# Altium PCB 10515.0461_全联供输出板_V1.0.PcbDoc (part 2 of 4)
Units mm, origin at the board's own origin, x right, y up, seen from the top; angles counter-clockwise.
Board outline 141.98 x 134.8 mm, 2 copper layers (Top Layer, Bottom Layer); 149 components, 131 nets, 632 pads, 485 vias.
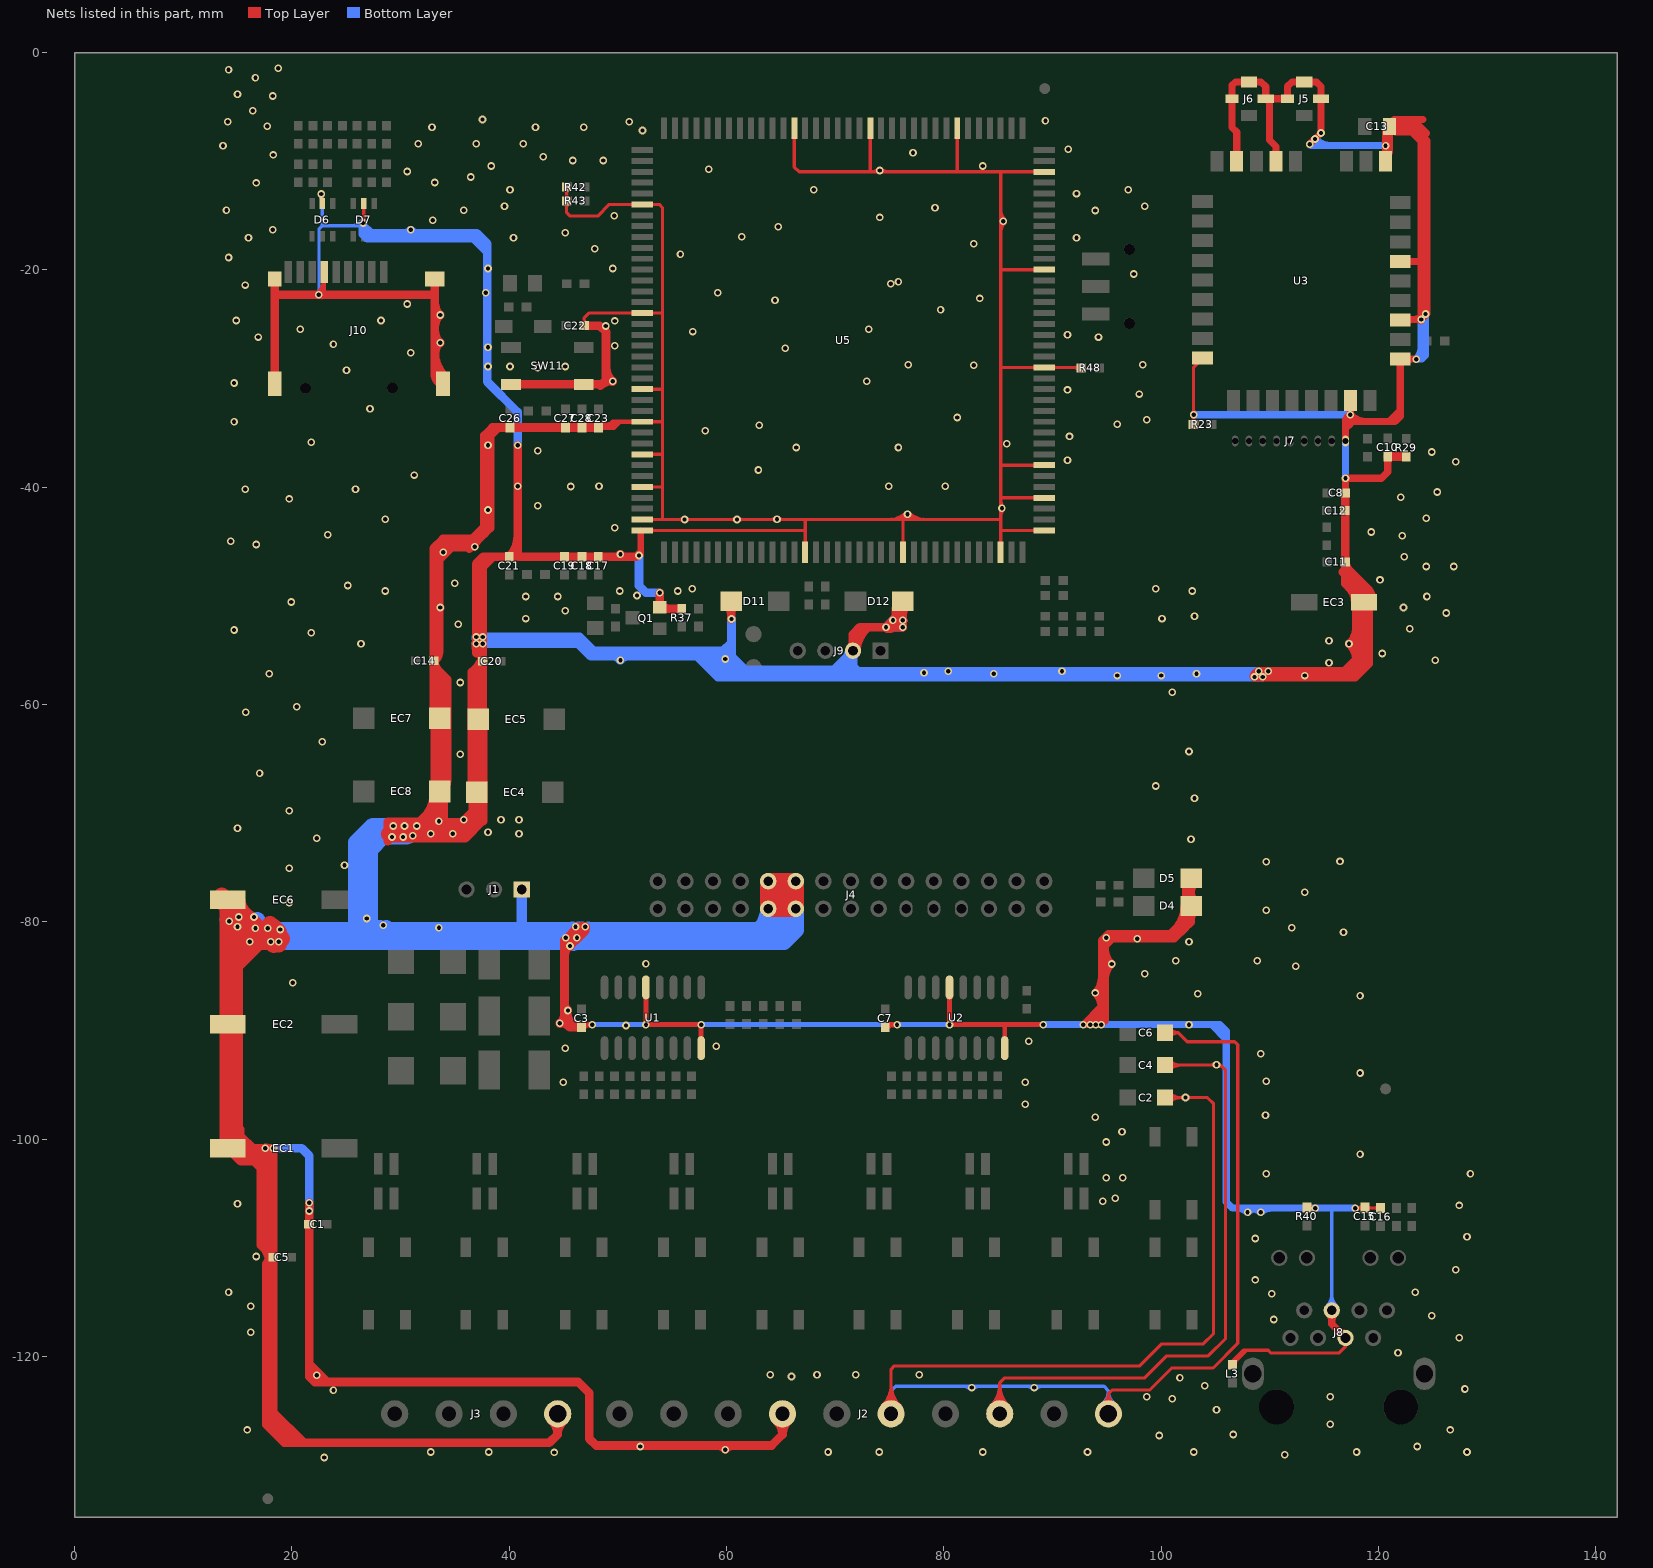
[diagram p2: the nets of this part, all layers, seen from the top]

## Via types
v1: diameter 0.7, hole 0.4, Top Layer to Bottom Layer, tented both sides, 485 vias

## Nets (pads, with @x,y where several pads share a name; then routed paths per layer and width w, separated by ;. In a path a pad name is that pad's centre, name@x,y a point inside that pad or via, vN(x,y) a via of type N, cw(c..) or ccw(c..) an arc to the next point about the centre after c; other vN are vias at no path point) (continued)
GND: C1.1 C2.2 C3.2 C4.2 C5.1 C6.2 C7.2 C8.2 C10.1 C11.2 C12.1 C13.1 C14.1 C15.2 C16.1 C17.1 C18.1 C19.1 C20.1 C21.1 C22.1 C23.1 C26.1 C27.1 C28.1 D4.2 D5.2 D6.2 D7.2 D11.2 D12.2 EC1.2 EC2.2 EC3.2 EC4.2 EC5.2 EC6.2 EC7.2 EC8.2 J1.1 J2.1 J2.3 J2.5 J2.7 J3.1 J4.9 J4.10 J4.11 J4.12 J5.2 J5.3 J5.4 J6.2 J6.3 J6.4 J7.1 J8.4 J8.5 J9.2 J10.6 J10.10 J10.11 J10.12 J10.13 L3.1 Q1.2 R23.1 R29.1 R37.1 R40.2 R42.2 R43.2 R48.1 SW11.3 SW11.4 U1.8 U1.13 U2.8 U2.13 U3.1 U3.5 U3.7 U3.17 U3.24 U3.26 U3.28 U3.31 U5.6 U5.16 U5.23 U5.26 U5.29 U5.32 U5.35 U5.36 U5.50 U5.59 U5.68 U5.71 U5.74 U5.77 U5.86 U5.95 U5.104 U5.113 U5.121 U5.128 | length 2417
  Top Layer w0.3: v1@22.338,-22.137 ccw(c20.832,-20.631) J10.6@22.961,-20.631 ; v1@22.55,-22.349 ccw(c21.557,-21.356) 22.961,-21.356 ; v1@22.553,-13.153 cw(c21.958,-13.748) D6.2@22.799,-13.748 ; 22.762,-22.561 ccw(c22.281,-22.08) 22.961,-22.08 ; D6.2@22.799,-13.896 v1@22.799,-13.068 ; J10.6@22.82,-20.972 cw(c22.478,-21.314) 22.961,-21.314 cw(c23.444,-21.314) J10.6@23.103,-20.972 ; 22.961,-22.278 J10.6@22.961,-20.181 J10.6@22.961,-19.331 ; v1@26.402,-15.533 ccw(c25.901,-15.032) 26.609,-15.032 ; v1@26.609,-15.608 D7.2@26.609,-13.896 ; R43.2@45.094,-13.823 cw(c44.656,-14.261) 45.276,-14.261 cw(c45.895,-14.261) R43.2@45.457,-13.823 ; R43.2@45.094,-13.461 ccw(c44.656,-13.023) 45.276,-13.023 ccw(c45.895,-13.023) R43.2@45.457,-13.461 ; R42.2@45.094,-12.553 cw(c44.656,-12.991) 45.276,-12.991 cw(c45.895,-12.991) R42.2@45.457,-12.553 ; R42.2@45.275,-12.372 45.275,-14.721 45.593,-15.039 48.133,-15.039 49.203,-13.969 U5.6@52.232,-13.969 53.794,-13.969 54.102,-14.277 54.102,-42.969 ; C22.1@46.707,-24.941 ccw(c46.269,-24.503) 46.888,-24.503 ccw(c47.507,-24.503) C22.1@47.07,-24.941 ; C22.1@46.888,-25.122 46.888,-24.412 47.331,-23.969 U5.16@52.232,-23.969 54.015,-23.969 ; U5.16@51.419,-24.057 ccw(c51.205,-24.271) 51.205,-23.969 ccw(c51.205,-23.667) U5.16@51.419,-23.881 ; U5.6@51.419,-14.057 ccw(c51.205,-14.271) 51.205,-13.969 ccw(c51.205,-13.667) U5.6@51.419,-13.881 ; v1@51.943,-46.408 51.943,-45.519 ; 51.943,-45.646 51.943,-45.519 ; 51.943,-44.968 cw(c53.231,-44.968) 52.32,-44.057 ccw(c52.534,-44.271) 52.232,-44.271 ccw(c51.93,-44.271) U5.36@52.144,-44.057 ; 51.943,-44.244 cw(c52.507,-44.244) U5.36@52.108,-43.845 ; U5.36@52.003,-44.189 cw(c52.232,-44.418) U5.36@52.232,-44.094 ; v1@52.014,-46.352 ccw(c51.487,-45.825) 52.232,-45.825 ; U5.36@52.025,-44.167 ccw(c51.827,-43.969) U5.36@52.107,-43.969 ; v1@52.07,-46.408 52.232,-46.246 U5.36@52.232,-43.969 ; v1@52.084,-46.14 cw(c52.426,-45.798) 51.943,-45.798 cw(c51.46,-45.798) 51.802,-46.14 ccw(c50.762,-45.1) 52.232,-45.1 ; U5.35@52.232,-42.969 54.102,-42.969 ; U5.32@52.232,-39.969 54.064,-39.969 ; U5.29@52.232,-36.969 54.061,-36.969 ; U5.26@52.232,-33.969 54.095,-33.969 ; U5.23@52.232,-30.969 54.03,-30.969 ; U5.36@53.045,-44.057 cw(c53.259,-44.271) 53.259,-43.969 cw(c53.259,-43.667) U5.36@53.045,-43.881 ; U5.35@53.045,-43.057 cw(c53.259,-43.271) 53.259,-42.969 cw(c53.259,-42.667) U5.35@53.045,-42.881 ; U5.32@53.045,-40.057 cw(c53.259,-40.271) 53.259,-39.969 cw(c53.259,-39.667) U5.32@53.045,-39.881 ; U5.29@53.045,-37.057 cw(c53.259,-37.271) 53.259,-36.969 cw(c53.259,-36.667) U5.29@53.045,-36.881 ; U5.26@53.045,-34.057 cw(c53.259,-34.271) 53.259,-33.969 ; U5.26@53.045,-33.881 ccw(c53.259,-33.667) 53.259,-33.969 ; U5.23@53.045,-31.057 cw(c53.259,-31.271) 53.259,-30.969 cw(c53.259,-30.667) U5.23@53.045,-30.881 ; U5.16@53.045,-24.057 cw(c53.259,-24.271) 53.259,-23.969 cw(c53.259,-23.667) U5.16@53.045,-23.881 ; U5.6@53.045,-14.057 cw(c53.259,-14.271) 53.259,-13.969 cw(c53.259,-13.667) U5.6@53.045,-13.881 ; v1@55.993,-43.11 ccw(c55.651,-43.452) 55.651,-42.969 ccw(c55.651,-42.486) v1@55.993,-42.828 ; v1@56.275,-43.11 cw(c56.617,-43.452) 56.617,-42.969 cw(c56.617,-42.486) v1@56.275,-42.828 ; D11.2@60.427,-50.472 D11.2@60.427,-50.218 ; v1@60.819,-43.11 ccw(c60.477,-43.452) 60.477,-42.969 ccw(c60.477,-42.486) v1@60.819,-42.828 ; v1@61.101,-43.11 cw(c61.443,-43.452) 61.443,-42.969 cw(c61.443,-42.486) v1@61.101,-42.828 ; J4.10@63.833,-76.253 J4.12@66.373,-76.253 ; 64.092,-42.969 ccw(c64.092,-42.39) v1@64.502,-42.799 ; 64.228,-42.969 cw(c64.228,-43.356) v1@64.502,-43.082 ; J4.10@64.266,-76.686 cw(c65.31,-77.73) 65.31,-76.253 cw(c65.31,-74.775) J4.10@64.266,-75.82 ; v1@64.784,-43.082 cw(c65.058,-43.356) 65.058,-42.969 ; v1@64.784,-42.799 ccw(c65.194,-42.39) 65.194,-42.969 ; J4.12@65.94,-76.686 ccw(c64.895,-77.73) 64.895,-76.253 ccw(c64.895,-74.775) J4.12@65.94,-75.82 ; U5.128@66.144,-7.782 cw(c65.93,-7.996) 66.232,-7.996 cw(c66.534,-7.996) U5.128@66.32,-7.782 ; U5.128@66.232,-6.969 66.232,-10.532 66.669,-10.969 85.232,-10.969 ; U5.50@67.144,-45.156 ccw(c66.93,-44.942) 67.232,-44.942 ccw(c67.534,-44.942) U5.50@67.32,-45.156 ; 67.157,-43.969 U5.36@52.232,-43.969 ; U5.50@67.232,-45.969 67.232,-43.018 ; U5.121@73.144,-7.782 cw(c72.93,-7.996) 73.232,-7.996 cw(c73.534,-7.996) U5.121@73.32,-7.782 ; 73.232,-10.889 U5.121@73.232,-6.969 ; 73.333,-10.969 ccw(c73.333,-10.073) v1@73.967,-10.707 ; v1@74.25,-10.707 ccw(c74.883,-10.073) 74.883,-10.969 ; J2.5@74.366,-124.497 ccw(c72.488,-122.619) 75.144,-122.619 ccw(c77.8,-122.619) J2.5@75.922,-124.497 ; J2.5@74.578,-124.709 ccw(c73.213,-123.344) 75.144,-123.344 ccw(c77.075,-123.344) J2.5@75.71,-124.709 ; 74.963,-42.969 ccw(c74.963,-40.786) v1@76.507,-42.33 ; J2.5@75.144,-125.275 75.144,-121.164 75.438,-120.87 98.025,-120.87 100.051,-118.844 103.861,-118.844 104.821,-117.884 104.821,-96.725 104.263,-96.167 C2.2@100.356,-96.167 ; 75.687,-42.969 ccw(c75.687,-41.51) v1@76.719,-42.542 ; U5.59@76.144,-45.156 ccw(c75.93,-44.942) 76.232,-44.942 ccw(c76.534,-44.942) U5.59@76.32,-45.156 ; U5.59@76.232,-45.969 76.232,-43.064 ; 76.365,-42.754 ccw(c76.885,-42.234) 76.885,-42.969 ; 76.412,-42.969 ccw(c76.412,-42.234) 76.931,-42.754 ; v1@76.577,-42.542 ccw(c77.609,-41.51) 77.609,-42.969 ; v1@76.79,-42.33 ccw(c78.333,-40.786) 78.333,-42.969 ; U5.113@81.144,-7.782 cw(c80.93,-7.996) 81.232,-7.996 cw(c81.534,-7.996) U5.113@81.32,-7.782 ; 81.232,-10.921 U5.113@81.232,-6.969 ; J2.3@84.366,-124.497 ccw(c82.488,-122.619) 85.144,-122.619 ccw(c87.8,-122.619) J2.3@85.922,-124.497 ; J2.3@84.578,-124.709 ccw(c83.213,-123.344) 85.144,-123.344 ccw(c87.075,-123.344) J2.3@85.71,-124.709 ; 85.095,-42.969 54.102,-42.969 ; U5.68@85.144,-45.156 ccw(c84.93,-44.942) 85.232,-44.942 ccw(c85.534,-44.942) U5.68@85.32,-45.156 ; J2.3@85.144,-125.275 85.144,-122.432 85.598,-121.978 98.484,-121.978 100.51,-119.952 104.32,-119.952 105.929,-118.343 105.929,-93.652 105.459,-93.182 ; U5.68@85.232,-45.969 85.232,-10.969 ; 85.232,-42.678 cw(c86.097,-42.678) v1@85.485,-42.066 ; 85.232,-41.172 ccw(c86.097,-41.172) v1@85.485,-41.783 ; 85.232,-16.569 cw(c86.531,-16.569) v1@85.612,-15.65 ; 85.232,-15.844 cw(c85.807,-15.844) v1@85.4,-15.438 ; 85.232,-15.173 ccw(c85.807,-15.173) v1@85.4,-15.58 ; 85.232,-14.449 ccw(c86.531,-14.449) v1@85.612,-15.367 ; 85.272,-28.969 U5.86@89.232,-28.969 R48.1@92.607,-28.969 ; 85.289,-37.969 U5.77@89.232,-37.969 ; 85.333,-43.969 U5.71@89.232,-43.969 ; 85.337,-40.969 U5.74@89.232,-40.969 ; 85.382,-19.969 U5.95@89.232,-19.969 ; U5.71@88.419,-44.057 ccw(c88.205,-44.271) 88.205,-43.969 ccw(c88.205,-43.667) U5.71@88.419,-43.881 ; U5.74@88.419,-41.057 ccw(c88.205,-41.271) 88.205,-40.969 ccw(c88.205,-40.667) U5.74@88.419,-40.881 ; U5.77@88.419,-38.057 ccw(c88.205,-38.271) 88.205,-37.969 ccw(c88.205,-37.667) U5.77@88.419,-37.881 ; U5.86@88.419,-29.057 ccw(c88.205,-29.271) 88.205,-28.969 ccw(c88.205,-28.667) U5.86@88.419,-28.881 ; U5.95@88.419,-20.057 ccw(c88.205,-20.271) 88.205,-19.969 ccw(c88.205,-19.667) U5.95@88.419,-19.881 ; U5.104@88.419,-11.057 ccw(c88.205,-11.271) 88.205,-10.969 ccw(c88.205,-10.667) U5.104@88.419,-10.881 ; U5.104@89.232,-10.969 85.232,-10.969 ; U5.86@90.045,-29.057 cw(c90.259,-29.271) 90.259,-28.969 cw(c90.259,-28.667) U5.86@90.045,-28.881 ; 91.893,-28.969 cw(c91.893,-29.725) R48.1@92.427,-29.19 ; 92.086,-28.969 ccw(c92.086,-28.487) R48.1@92.427,-28.828 ; J2.1@94.628,-124.303 ccw(c94.174,-123.446) 95.144,-123.446 ; J2.1@94.769,-124.568 ccw(c94.438,-123.945) 95.144,-123.945 ccw(c95.85,-123.945) J2.1@95.519,-124.568 ; J2.1@95.144,-125.275 95.144,-123.446 ; J2.1@95.66,-124.303 cw(c96.114,-123.446) 95.144,-123.446 ; C4.2@100.356,-93.182 105.459,-93.182 ; C6.2@100.356,-90.198 101.575,-90.198 ; C2.2@100.78,-96.591 cw(c101.804,-97.615) 101.804,-96.167 cw(c101.804,-94.718) C2.2@100.78,-95.742 ; C4.2@100.78,-93.606 cw(c101.804,-94.631) 101.804,-93.182 cw(c101.804,-91.734) C4.2@100.78,-92.758 ; C6.2@100.831,-90.563 cw(c101.575,-91.135) 101.575,-90.198 ; C6.2@100.831,-89.832 ccw(c101.575,-89.26) 101.575,-90.198 ; v1@102.094,-96.308 ccw(c101.752,-96.649) 101.752,-96.167 ccw(c101.752,-95.684) v1@102.094,-96.025 ; v1@102.376,-96.308 cw(c102.718,-96.649) 102.718,-96.167 cw(c102.718,-95.684) v1@102.376,-96.025 ; R23.1@102.796,-34.035 ccw(c102.358,-33.597) 102.978,-33.597 ccw(c103.597,-33.597) R23.1@103.159,-34.035 ; v1@102.856,-33.468 cw(c102.561,-33.763) 102.978,-33.763 ; v1@102.856,-33.186 ccw(c102.561,-32.891) 102.978,-32.891 ; R23.1@102.978,-34.216 102.978,-28.934 U3.17@103.803,-28.108 ; R23.1@102.978,-33.857 cw(c103.527,-33.857) v1@103.138,-33.468 ; 102.978,-32.797 ccw(c103.527,-32.797) v1@103.138,-33.186 ; 104.521,-93.182 ccw(c104.521,-92.569) v1@104.955,-93.003 ; 104.705,-93.182 cw(c104.705,-93.535) v1@104.955,-93.285 ; v1@105.211,-93.308 cw(c105.394,-93.572) 105.621,-93.344 ; v1@105.245,-93.278 cw(c105.459,-93.47) 105.459,-93.182 ; v1@105.28,-93.064 ccw(c105.459,-92.986) 105.459,-93.182 ; L3.1@106.509,-120.728 cw(c107.079,-120.728) L3.1@106.676,-120.326 ; L3.1@106.553,-120.472 ccw(c106.553,-119.761) 107.056,-120.264 ; 106.964,-120.356 ccw(c107.336,-120.728) 106.809,-120.728 cw(c108.103,-120.728) 107.188,-119.814 ; 107.823,-119.496 L3.1@106.553,-120.766 106.553,-120.449 107.569,-119.433 109.855,-119.433 110.109,-119.687 116.332,-119.687 116.971,-119.048 J8.4@116.971,-118.294 ; R40.2@113.411,-106.288 v1@114.236,-106.288 ; R40.2@113.537,-106.288 cw(c113.537,-106.988) v1@114.032,-106.493 ; R40.2@113.592,-106.47 cw(c114.03,-106.908) 114.03,-106.288 cw(c114.03,-105.669) R40.2@113.592,-106.107 ; v1@117.917,-106.291 C15.2@118.753,-106.291 ; v1@117.997,-106.493 cw(c118.487,-106.983) C15.2@118.487,-106.291 ; C15.2@118.571,-106.472 ccw(c118.134,-106.91) 118.134,-106.291 ccw(c118.134,-105.672) C15.2@118.571,-106.109 ; C15.2@118.798,-106.336 C16.1@120.192,-106.336 ; C15.2@118.934,-106.51 cw(c119.354,-106.931) 119.354,-106.336 ; C15.2@118.934,-106.148 ccw(c119.389,-105.693) 119.389,-106.336 ; C16.1@120.011,-106.517 ccw(c119.573,-106.955) 119.573,-106.336 ccw(c119.573,-105.717) C16.1@120.011,-106.155 ; U3.28@122.003,-24.608 U3.28@122.047,-24.608 ; v1@123.93,-24.586 v1(123.93,-24.564) ; 51.943,-45.519 51.943,-44.249 52.223,-43.969 U5.36@52.232,-43.969 ; 95.144,-123.446 95.504,-123.086 98.943,-123.086 100.969,-121.06 104.779,-121.06 107.037,-118.802 107.037,-91.309 106.759,-91.031 102.408,-91.031 101.575,-90.198
  Top Layer w0.45: C3.2@46.659,-89.69 46.888,-89.461 v1(47.625,-89.461) ; C3.2@46.787,-89.78 cw(c47.557,-90.549) v1@47.557,-89.461 ; C23.1@48.21,-34.495 49.632,-34.495 50.158,-33.969 ; C23.1@48.338,-34.624 cw(c48.648,-34.933) 48.648,-34.495 cw(c48.648,-34.057) C23.1@48.338,-34.367 ; C23.1@48.338,-34.586 cw(c49.2,-35.447) 49.2,-34.229 ; C23.1@48.477,-34.229 49.289,-34.229 ; 49.022,-34.495 49.289,-34.229 ; U5.26@52.232,-33.969 50.158,-33.969 ; U1.13@52.578,-86.032 v1(52.578,-89.461) v1(57.658,-89.461) U1.8@57.658,-91.62 ; C7.2@74.727,-89.78 cw(c75.497,-90.549) v1@75.497,-89.461 ; C7.2@74.828,-89.461 v1(75.692,-89.461) ; U2.13@80.518,-86.032 v1(80.518,-89.461) 85.598,-89.461 ; U2.8@85.598,-91.62 85.598,-89.461 ; v1(89.154,-89.461) 85.598,-89.461 ; 49.289,-34.229 49.548,-33.969 50.158,-33.969
  Top Layer w0.65: v1@92.837,-89.436 ccw(c92.837,-88.149) 93.747,-89.059 ; v1@93.472,-89.436 ccw(c93.472,-88.149) 94.382,-89.059 ; v1@93.497,-89.461 cw(c95.09,-89.461) 93.964,-88.334 ; v1@93.902,-86.558 cw(c92.489,-87.971) 94.488,-87.971 ; v1@93.902,-86.522 ccw(c92.489,-85.109) 94.488,-85.109 ; v1@93.981,-89.436 ccw(c94.009,-88.22) 94.869,-89.08 ; v1@94.005,-89.461 cw(c95.598,-89.461) 94.472,-88.334 ; v1@94.47,-89.443 ccw(c93.508,-88.481) 94.869,-88.481 ; 94.488,-88.318 93.345,-89.461 v1(92.837,-89.461) ; 94.488,-87.81 v1(92.837,-89.461) ; 94.488,-82.602 cw(c96.079,-82.602) 94.954,-81.478 cw(c95.916,-82.44) 95.916,-81.079 ; 94.488,-81.975 cw(c94.98,-81.975) v1@94.938,-81.485 ; 94.562,-81.64 cw(c94.936,-82.014) v1@94.936,-81.485 ; 94.869,-85.322 cw(c96.893,-85.322) v1@95.462,-83.891 ; 94.869,-82.424 ccw(c96.893,-82.424) v1@95.462,-83.855 ; v1@94.961,-81.46 cw(c95.49,-81.46) 95.116,-81.086 ; 96.595,-81.079 cw(c96.595,-82.744) v1@97.772,-81.567 ; v1@97.808,-81.567 cw(c98.985,-82.744) 98.985,-81.079 ; 101.193,-80.724 ccw(c99.02,-78.551) D4.2@102.093,-78.541 ; 102.108,-80.698 102.768,-80.038 D4.2@102.768,-78.539 D5.2@102.768,-75.999 ; 102.235,-80.246 cw(c103.609,-80.246) D4.2@102.946,-79.043 ; 102.235,-80.19 102.235,-76.532 ccw(c104.162,-76.532) D4.2@103.011,-78.078 ; 102.235,-79.682 100.838,-81.079 100.711,-81.079 ; D4.2@102.235,-78.433 cw(c105.102,-78.433) D5.2@103.075,-76.406 ; D5.2@102.235,-76.863 cw(c103.532,-76.863) D5.2@102.615,-75.946 ; 102.297,-79.62 ccw(c101.222,-78.544) D4.2@102.743,-78.539 ; D4.2@102.361,-78.946 cw(c101.38,-79.927) 102.768,-79.927 cw(c104.156,-79.927) D4.2@103.175,-78.946 ; D4.2@102.361,-78.132 ccw(c101.38,-77.151) 102.768,-77.151 ccw(c104.156,-77.151) D4.2@103.175,-78.132 ; D5.2@102.361,-76.406 cw(c101.38,-77.387) 102.768,-77.387 cw(c104.156,-77.387) D5.2@103.175,-76.406 ; U3.7@106.759,-9.464 ccw(c106.289,-8.994) 106.953,-8.994 ccw(c107.617,-8.994) U3.7@107.147,-9.464 ; U3.7@106.953,-10.008 106.953,-7.311 106.527,-6.885 J6.4@106.527,-4.244 106.527,-3 106.833,-2.694 J6.2@108.077,-2.694 109.194,-2.694 109.627,-3.127 J6.3@109.627,-4.244 ; U3.5@110.359,-9.464 ccw(c109.889,-8.994) 110.553,-8.994 ccw(c111.217,-8.994) U3.5@110.747,-9.464 ; U3.5@110.553,-10.008 110.553,-8.625 109.982,-8.054 109.982,-4.599 J6.3@109.627,-4.244 ; v1(113.665,-8.435) v1(114.707,-7.393) J5.3@114.707,-4.244 114.707,-3.127 114.274,-2.694 J5.2@113.157,-2.694 112.04,-2.694 111.607,-3.127 J5.4@111.607,-4.244 J6.3@109.627,-4.244 ; J8.5@115.4,-116.054 cw(c114.675,-116.78) 115.701,-116.78 cw(c116.727,-116.78) J8.5@116.001,-116.054 ; J8.5@115.701,-115.754 115.701,-117.024 J8.4@116.971,-118.294 ; J8.4@116.546,-118.294 ccw(c115.52,-118.294) 116.245,-117.568 ccw(c116.971,-116.843) J8.4@116.971,-117.869 ; C8.2@116.967,-40.491 v1(116.967,-39.169) 120.269,-39.169 120.854,-38.584 C10.1@120.854,-37.162 ; J7.1@116.967,-35.74 116.967,-34.597 ; 116.967,-34.457 cw(c118.54,-34.457) v1@117.428,-33.345 ; 116.967,-33.954 cw(c117.596,-33.954) v1@117.417,-33.351 ; U3.24@117.216,-32.552 cw(c116.746,-33.022) 117.41,-33.022 cw(c118.074,-33.022) U3.24@117.605,-32.552 ; v1(117.41,-33.327) 116.967,-33.77 116.967,-34.597 ; U3.24@117.41,-32.008 117.41,-33.962 ; v1@117.428,-33.309 ccw(c119.004,-31.734) 119.004,-33.962 ; v1@120.635,-8.544 ccw(c119.68,-7.589) 121.031,-7.589 ; v1@120.642,-8.585 cw(c120.357,-9.195) U3.1@121.031,-9.195 ; v1@120.653,-8.508 cw(c122.573,-8.508) 121.215,-7.15 ccw(c121.661,-7.596) 121.031,-7.596 ; C13.1@120.827,-7.15 cw(c120.333,-7.644) 121.031,-7.644 ; U3.1@120.847,-9.464 cw(c121.317,-8.994) 120.653,-8.994 cw(c119.989,-8.994) 120.459,-9.464 ccw(c119.077,-8.082) 121.031,-8.082 ; 120.987,-33.962 122.003,-32.946 ; C13.1@121.031,-6.804 121.031,-9.07 120.653,-9.448 U3.1@120.653,-10.008 v1(120.653,-8.562) 120.653,-7.162 C13.1@121.021,-6.794 ; C13.1@121.215,-6.988 cw(c121.685,-7.458) 121.685,-6.794 cw(c121.685,-6.13) C13.1@121.215,-6.6 ; C13.1@121.215,-6.826 cw(c122.851,-8.462) 122.851,-6.149 ; C13.1@121.215,-6.762 ccw(c122.496,-5.481) 122.496,-7.292 ; U3.26@121.809,-28.402 cw(c121.339,-28.872) 122.003,-28.872 cw(c122.667,-28.872) U3.26@122.197,-28.402 ; U3.31@122.003,-19.208 123.93,-19.208 ; U3.28@122.047,-24.564 v1(123.93,-24.564) 123.93,-19.208 ; U3.26@122.547,-28.402 cw(c123.017,-28.872) 123.017,-28.208 cw(c123.017,-27.544) U3.26@122.547,-28.014 ; U3.28@122.547,-24.802 cw(c123.123,-25.378) 123.123,-24.564 ; U3.31@122.547,-19.402 cw(c123.017,-19.872) 123.017,-19.208 cw(c123.017,-18.544) U3.31@122.547,-19.014 ; 123.046,-24.564 ccw(c123.046,-22.769) 124.315,-24.038 ccw(c123.966,-23.689) 124.46,-23.689 ; v1(123.483,-28.208) U3.26@122.003,-28.208 122.003,-32.946 ; v1@123.93,-24.704 cw(c124.61,-24.704) v1@124.343,-24.079 ; v1@123.93,-24.586 124.46,-24.056 124.46,-8.076 123.93,-7.546 ; 123.93,-23.023 ccw(c125.366,-23.023) v1@124.351,-24.038 ; 123.93,-8.181 123.041,-7.292 121.519,-7.292 C13.1@121.021,-6.794 ; 124.079,-6.149 123.571,-6.149 ; 124.4,-7.419 123.571,-6.59 123.571,-6.149 ; v1(92.837,-89.461) v1(93.98,-89.461) ; v1(93.98,-89.461) v1(94.488,-89.461) 94.869,-89.08 ; v1(93.98,-89.461) 94.488,-88.953 94.488,-81.714 95.123,-81.079 100.711,-81.079 ; 94.869,-89.08 94.869,-82.222 95.504,-81.587 101.219,-81.587 102.26,-80.546 101.727,-81.079 100.711,-81.079 ; 116.967,-34.597 117.41,-34.154 117.41,-33.962 ; 117.41,-33.962 121.539,-33.962 122.003,-33.498 122.003,-32.946 ; C13.1@121.021,-6.794 121.021,-6.54 121.412,-6.149 123.571,-6.149 ; C13.1@121.021,-6.794 123.178,-6.794 123.93,-7.546 ; 123.93,-19.208 123.93,-7.546 ; v1@94.954,-81.442 ccw(c95.303,-81.093) 95.303,-81.587 cw(c95.303,-81.093) v1@94.954,-81.442
  Top Layer w0.8: EC1.2@13.766,-100.526 ccw(c12.998,-99.758) 14.084,-99.758 ccw(c15.17,-99.758) EC1.2@14.402,-100.526 ; EC2.2@13.766,-89.732 cw(c12.998,-90.5) 14.084,-90.5 cw(c15.17,-90.5) EC2.2@14.402,-89.732 ; EC2.2@13.766,-89.096 ccw(c12.998,-88.328) 14.084,-88.328 ccw(c15.17,-88.328) EC2.2@14.402,-89.096 ; EC6.2@13.766,-78.302 cw(c12.998,-79.07) 14.084,-79.07 cw(c15.17,-79.07) EC6.2@14.402,-78.302 ; v1@14.174,-79.936 ccw(c15.28,-79.936) 14.498,-80.718 ; EC2.2@14.566,-89.732 cw(c13.245,-91.053) 15.113,-91.053 ; EC2.2@14.566,-89.096 ccw(c13.245,-87.775) 15.113,-87.775 ; EC1.2@14.594,-100.5 ccw(c13.428,-99.113) 15.24,-99.113 15.24,-100.002 14.398,-100.844 EC1.2@14.084,-100.844 ; EC1.2@14.731,-100.529 cw(c15.345,-101.793) 16.338,-100.799 ; EC6.2@14.884,-78.434 cw(c14.884,-79.347) EC6.2@15.529,-78.701 ; EC1.2@14.98,-101.284 cw(c15.195,-102.261) 15.902,-101.553 ; 15.113,-99.113 15.113,-84 ; 15.113,-82.349 15.113,-81.333 ; EC1.2@15.202,-101.162 cw(c15.97,-101.93) 15.97,-100.844 cw(c15.97,-99.758) EC1.2@15.202,-100.526 ; 15.24,-99.701 16.383,-100.844 ; 15.24,-84 17.399,-81.841 ; EC1.2@15.244,-100.574 ccw(c16.891,-99.343) 16.891,-101.399 ; EC6.2@15.334,-77.984 ccw(c16.594,-77.984) 15.703,-78.875 ; 15.347,-82.115 cw(c16.129,-82.897) v1@16.129,-81.791 ; 15.367,-82.095 cw(c16.102,-82.83) v1@16.13,-81.791 ; 15.367,-81.587 ccw(c16.102,-80.852) v1@16.13,-81.891 ; 16.184,-79.356 cw(c14.968,-80.571) v1@16.687,-80.571 ; v1@16.637,-80.521 cw(c16.637,-82.24) 17.852,-81.024 ; 17.035,-82.205 cw(c18.034,-83.203) v1@18.034,-81.791 ; 17.082,-82.158 cw(c17.972,-83.049) v1@18.037,-81.791 ; 17.215,-80.387 ccw(c17.78,-79.822) v1@17.78,-80.621 ; v1@17.476,-100.844 ccw(c18.45,-100.844) 17.761,-101.533 ; v1@17.53,-100.794 cw(c17.474,-101.581) 18.263,-101.581 ; v1@17.561,-100.809 cw(c15.868,-102.502) 18.263,-102.502 ; v1@17.575,-100.855 cw(c16.891,-100.697) 16.891,-101.399 ; 17.653,-125.148 17.653,-124.513 ; 17.653,-112.269 cw(c19.62,-112.269) C5.1@18.229,-110.879 ; 17.653,-111.71 cw(c18.54,-111.71) C5.1@18.227,-110.88 ; 17.653,-109.479 ccw(c19.62,-109.479) C5.1@18.229,-110.869 ; v1@17.653,-80.825 14.812,-77.984 EC6.2@14.084,-77.984 14.084,-80.304 15.113,-81.333 ; C5.1@18.225,-110.868 cw(c18.257,-110.264) 17.653,-110.264 ; 18.263,-102.034 17.628,-101.399 16.891,-101.399 ; J10.11@18.415,-30.471 18.415,-22.278 ; J10.10@18.415,-20.819 18.415,-22.278 ; v1(18.796,-81.841) 15.621,-81.841 ; 20.066,-127.942 17.653,-125.529 17.653,-126.291 ; 21.209,-127.942 43.688,-127.942 44.457,-127.173 ; v1(21.59,-105.844) 21.59,-120.703 ; 22.156,-121.269 cw(c21.705,-121.719) v1@22.342,-121.719 ; v1@22.248,-121.741 ccw(c23.241,-121.242) 23.241,-122.354 ; v1@22.271,-121.764 cw(c22.757,-120.703) 21.59,-120.703 ; v1@22.292,-121.669 cw(c22.292,-122.306) 22.743,-121.856 ; 28.829,-72.591 cw(c29.288,-72.591) v1@29.2,-72.14 ; 28.829,-72.279 cw(c30.443,-72.279) 29.302,-71.138 cw(c30.136,-71.972) 30.136,-70.792 ; 28.829,-71.39 ccw(c30.009,-71.39) v1@29.175,-72.224 ; v1(29.337,-71.173) v1@29.337,-72.316 ; v1@29.383,-71.153 ccw(c28.829,-71.397) 28.829,-70.792 ; 29.554,-70.792 cw(c29.554,-71.972) v1@30.388,-71.138 ; v1@30.318,-71.138 cw(c31.152,-71.972) 31.152,-70.792 ; 30.622,-72.316 ccw(c30.622,-71.569) v1@31.15,-72.097 ; 30.697,-70.792 cw(c30.697,-71.972) v1@31.531,-71.138 ; v1@31.08,-72.097 ccw(c31.608,-71.569) 31.608,-72.316 ; 32.223,-70.319 ccw(c30.292,-68.389) EC8.2@33.003,-68.069 ; J10.13@32.936,-21.03 cw(c32.426,-21.54) 33.147,-21.54 cw(c33.868,-21.54) J10.13@33.358,-21.03 ; EC7.2@33.045,-60.413 ccw(c34.453,-60.413) EC7.2@33.458,-61.408 ; 33.045,-58.482 ccw(c36.384,-58.482) 34.023,-60.843 cw(c35.048,-59.818) 33.599,-59.818 cw(c32.15,-59.818) 33.175,-60.843 ccw(c30.482,-58.15) 34.29,-58.15 ; 33.045,-56.441 34.29,-57.686 34.29,-66.982 ; 33.045,-52.42 cw(c35.006,-52.42) v1@33.62,-51.034 ; 33.045,-49.718 ccw(c35.006,-49.718) v1@33.62,-51.104 ; C14.1@33.079,-55.955 ccw(c31.995,-54.871) 33.528,-54.871 ; C14.1@33.08,-55.954 ccw(c32.619,-55.171) 33.528,-55.171 ; EC8.2@33.147,-67.546 33.147,-61.267 EC7.2@33.599,-61.267 ; 33.147,-65.458 ccw(c36.139,-65.458) 34.023,-67.574 cw(c35.048,-66.549) 33.599,-66.549 cw(c32.15,-66.549) 33.175,-67.574 ccw(c30.482,-64.881) 34.29,-64.881 ; 33.147,-63.807 cw(c36.139,-63.807) 34.023,-61.691 ccw(c35.048,-62.716) 33.599,-62.716 ccw(c32.15,-62.716) 33.175,-61.691 cw(c30.482,-64.384) 34.29,-64.384 ; 33.147,-29.488 ccw(c34.385,-29.488) J10.12@33.509,-30.363 ; 33.147,-27.791 cw(c34.761,-27.791) v1@33.62,-26.65 ; 33.147,-27.556 ccw(c36.316,-27.556) J10.12@34.075,-29.797 ; 33.147,-25.579 ccw(c34.761,-25.579) v1@33.62,-26.72 ; 33.147,-25.251 cw(c34.761,-25.251) v1@33.62,-24.11 ; 33.147,-23.039 ccw(c34.761,-23.039) v1@33.62,-24.18 ; J10.13@33.147,-20.819 33.147,-22.278 ; 33.338,-55.361 ccw(c33.937,-55.96) 33.09,-55.96 ccw(c34.359,-55.96) 33.462,-56.857 ; 33.389,-69.153 ccw(c32.378,-68.142) EC8.2@33.798,-67.974 ; 33.409,-46.146 cw(c33.909,-46.646) v1@33.909,-45.939 ; EC8.2@33.599,-68.943 31.75,-70.792 28.829,-70.792 ; 33.599,-56.995 EC7.2@33.599,-61.267 ; EC8.2@33.74,-68.139 ccw(c32.414,-66.813) 34.29,-66.813 ; EC7.2@33.74,-61.408 ccw(c32.414,-60.082) 34.29,-60.082 ; EC7.2@33.74,-61.126 cw(c32.414,-62.452) 34.29,-62.452 ; 33.788,-46.402 ccw(c33.375,-45.989) v1@33.959,-45.989 ; v1@33.859,-45.992 cw(c34.467,-45.95) 34.036,-45.519 ; v1@33.874,-45.954 cw(c34.923,-47.003) 34.923,-45.519 ; v1@33.909,-46.039 ccw(c33.909,-45.454) 34.322,-45.868 ; J10.12@33.909,-30.471 33.147,-29.709 33.147,-22.278 ; EC8.2@34.147,-67.754 cw(c34.78,-67.472) 34.29,-66.982 ; 34.671,-45.519 33.528,-46.662 33.528,-55.171 ; 36.33,-45.638 cw(c36.83,-46.138) v1@36.83,-45.431 ; EC4.2@36.576,-67.638 36.576,-57.001 C20.1@37.567,-56.01 ; 36.576,-65.571 ccw(c39.517,-65.571) 37.437,-67.651 cw(c38.462,-66.626) 37.013,-66.626 cw(c35.564,-66.626) 36.589,-67.651 ccw(c34.167,-65.229) 37.592,-65.229 ; 36.576,-64.154 cw(c39.95,-64.154) 37.564,-61.768 ccw(c38.895,-63.099) 37.013,-63.099 ; EC5.2@36.576,-62.223 cw(c38.019,-62.223) EC5.2@36.999,-61.203 ; EC5.2@36.576,-60.465 ccw(c38.019,-60.465) EC5.2@36.999,-61.485 ; 36.576,-58.534 ccw(c39.95,-58.534) 37.564,-60.92 cw(c38.589,-59.895) 37.14,-59.895 cw(c35.691,-59.895) 36.716,-60.92 ccw(c34.662,-58.866) 37.567,-58.866 ; EC4.2@36.611,-68.52 cw(c34.616,-70.729) 37.592,-70.729 ; v1@36.78,-45.481 cw(c37.487,-45.481) 36.987,-44.981 ; v1@36.907,-54.405 ccw(c38.084,-54.501) 37.249,-55.336 ; 36.957,-55.289 cw(c37.979,-55.289) v1@37.545,-54.364 ; 36.957,-55.125 cw(c38.918,-55.125) v1@37.531,-53.739 ; 36.957,-53.058 ccw(c38.918,-53.058) v1@37.531,-54.444 ; 36.957,-52.423 ccw(c38.918,-52.423) v1@37.531,-53.809 ; v1@36.992,-54.444 ccw(c35.606,-53.058) 37.567,-53.058 ; v1@36.992,-54.374 cw(c35.606,-55.76) C20.1@37.567,-55.76 ; v1@36.992,-53.809 ccw(c35.606,-52.423) 37.567,-52.423 ; v1@36.992,-53.739 cw(c35.606,-55.125) 37.567,-55.125 ; 37.013,-62.486 ccw(c35.998,-62.486) 36.716,-61.768 cw(c34.6,-63.884) 37.592,-63.884 ; 37.14,-56.963 cw(c38.482,-56.963) C20.1@37.533,-56.015 ; 37.14,-56.587 cw(c37.753,-56.587) C20.1@37.531,-56.016 ; EC4.2@37.147,-67.927 cw(c36.242,-68.928) EC4.2@37.592,-68.928 ; EC4.2@37.154,-68.216 ccw(c36.098,-67.16) EC4.2@37.592,-67.16 ; 37.239,-55.326 cw(c36.554,-56.01) C20.1@37.522,-56.01 ; EC5.2@37.592,-60.403 EC4.2@37.592,-67.496 ; 37.719,-43.614 36.576,-44.757 33.909,-44.757 33.045,-45.621 33.045,-46.51 ; 37.719,-42.745 cw(c38.695,-42.745) v1@38.005,-42.055 ; 37.719,-41.435 ccw(c38.695,-41.435) v1@38.005,-42.125 ; 37.719,-36.776 cw(c38.695,-36.776) v1@38.005,-36.086 ; 37.719,-35.466 ccw(c38.695,-35.466) v1@38.005,-36.156 ; v1@38.076,-42.125 ccw(c37.71,-41.76) 38.227,-41.76 ; v1@38.076,-42.055 cw(c37.71,-42.42) 38.227,-42.42 ; v1@38.076,-36.156 ccw(c37.71,-35.791) 38.227,-35.791 ; v1@38.076,-36.086 cw(c37.71,-36.451) 38.227,-36.451 ; 38.989,-34.495 38.227,-35.257 38.227,-43.741 37.719,-44.249 ; C21.1@40,-46.365 ccw(c38.15,-44.515) 40.767,-44.515 ; SW11.3@40.16,-30.531 SW11.4@46.86,-30.531 48.516,-30.531 48.895,-30.152 48.895,-25.707 48.31,-25.122 C22.1@46.888,-25.122 ; v1(40.767,-36.121) 40.767,-46.408 ; J3.1@43.891,-125.909 cw(c42.763,-127.173) 44.457,-127.173 ; J3.1@44.457,-125.275 44.457,-127.173 ; v1@44.632,-89.285 cw(c44.818,-90.041) 45.369,-89.491 ; v1@44.644,-89.284 cw(c44.644,-90.534) 45.528,-89.65 ; v1@44.678,-89.371 ccw(c43.829,-88.445) 45.085,-88.445 ; J3.1@45.023,-125.909 ccw(c46.151,-127.173) 44.457,-127.173 ; 45.085,-88.789 cw(c46.035,-88.789) v1@45.363,-88.118 ; 45.085,-88.761 cw(c45.968,-88.761) v1@45.364,-88.116 ; 45.085,-87.517 ccw(c46.035,-87.517) v1@45.363,-88.188 ; 45.085,-82.94 cw(c45.927,-82.94) v1@45.572,-82.177 ; C27.1@45.162,-34.495 C23.1@48.21,-34.495 C26.1@40.082,-34.495 38.456,-34.495 37.719,-35.232 37.719,-44.249 ; v1@45.35,-88.142 ccw(c46.556,-88.4) 45.684,-89.272 ; v1@45.543,-82.222 cw(c47.875,-82.222) v1@46.226,-80.573 ; v1@45.588,-82.272 cw(c45.646,-81.714) v1@45.085,-81.714 ; 45.63,-89.219 ccw(c46.659,-88.191) C3.2@46.659,-89.645 ; 45.991,-80.808 cw(c46.99,-81.806) v1@46.99,-80.394 ; 46.007,-80.792 ccw(c45.658,-80.444) v1@46.151,-80.444 ; v1@46.038,-80.761 cw(c46.928,-81.652) v1@46.993,-80.394 ; 46.101,-89.69 45.085,-88.674 45.085,-88.445 ; v1@46.183,-81.482 cw(c46.994,-81.083) v1@46.355,-80.444 ; C3.2@46.659,-89.69 45.568,-89.69 45.085,-89.207 45.085,-88.445 ; 46.806,-81.009 ccw(c46.241,-80.444) v1@47.04,-80.444 ; 48.38,-30.667 cw(c49.53,-31.818) v1@49.53,-30.191 ; 48.533,-30.514 cw(c49.349,-31.33) v1@49.538,-30.192 ; 48.895,-28.829 ccw(c50.942,-28.829) v1@49.495,-30.276 ; 49.74,-46.408 ccw(c49.74,-45.661) v1@50.268,-46.189 ; v1@50.197,-46.189 ccw(c50.725,-45.661) 50.725,-46.408 ; v1@51.943,-46.154 51.689,-46.408 C17.1@48.183,-46.408 C18.1@46.697,-46.408 C19.1@45.085,-46.408 40.767,-46.408 ; v1(53.848,-49.71) Q1.2@53.848,-51.062 53.957,-51.17 R37.1@55.88,-51.17 ; Q1.2@54.033,-50.941 ccw(c54.588,-50.386) 54.588,-51.17 ; 59.085,-128.196 cw(c59.085,-129.376) v1@59.92,-128.542 ; v1@59.849,-128.542 cw(c60.683,-129.376) 60.683,-128.196 ; D11.2@60.073,-50.826 cw(c59.22,-51.679) 60.427,-51.679 cw(c61.634,-51.679) D11.2@60.781,-50.826 ; v1@60.427,-52.123 D11.2@60.427,-50.472 ; J2.7@64.575,-125.906 cw(c63.419,-127.187) 65.144,-127.187 ; J2.7@65.144,-125.275 65.144,-127.187 ; J2.7@65.713,-125.906 ccw(c66.869,-127.187) 65.144,-127.187 ; J9.2@71.381,-54.797 ccw(c70.783,-54.199) 71.628,-54.199 ccw(c72.473,-54.199) J9.2@71.875,-54.797 ; J9.2@71.628,-55.044 71.628,-53.52 72.263,-52.885 73.025,-52.885 ; J9.2@71.878,-54.799 cw(c72.27,-54.416) 71.882,-54.028 73.025,-52.885 ; J9.2@71.978,-55.044 cw(c74.663,-55.044) 72.764,-53.146 ; v1@74.645,-52.924 ccw(c74.956,-52.53) 75.311,-52.885 v1@76.225,-51.971 ; v1@74.676,-52.935 ccw(c74.676,-51.523) 75.675,-52.521 ; v1@74.768,-52.793 cw(c76.2,-54.226) 76.2,-52.2 ccw(c76.2,-52.693) 75.852,-52.344 ; v1@74.788,-52.885 ccw(c74.788,-50.838) v1@76.235,-52.285 ; v1@75.121,-52.44 cw(c75.853,-53.173) v1@76.218,-52.203 ; v1@75.265,-52.27 ccw(c76.2,-51.867) v1(76.2,-52.885) ; v1@75.306,-52.3 ccw(c75.418,-51.164) v1@76.225,-51.971 ; v1@75.346,-52.285 ccw(c74.818,-51.757) 75.565,-51.757 ; v1@75.354,-52.275 cw(c74.295,-51.66) 74.295,-52.885 ; v1@75.565,-52.096 cw(c76.838,-52.096) D12.2@76.326,-50.93 ; v1@76.16,-52.915 cw(c76.734,-52.48) v1@76.225,-51.971 ; v1@76.171,-52.291 cw(c76.976,-51.132) 75.565,-51.132 75.565,-51.996 v1(74.676,-52.885) 74.295,-52.885 ; v1@108.535,-57.452 cw(c109.093,-57.51) v1@109.093,-56.949 ; v1@108.55,-57.422 cw(c109.691,-58.563) v1@109.691,-56.949 ; v1@108.749,-57.457 ccw(c108.749,-55.843) v1@109.89,-56.984 ; v1@108.931,-56.984 ccw(c110.072,-55.843) 110.072,-57.457 ; v1@109.312,-57.422 cw(c110.453,-58.563) 110.453,-56.949 ; v1@109.82,-56.984 ccw(c110.961,-55.843) 110.961,-57.457 ; 112.425,-56.949 cw(c112.425,-58.129) v1@113.26,-57.295 ; v1@113.189,-57.295 cw(c114.023,-58.129) 114.023,-56.949 ; 116.702,-47.794 cw(c113.915,-50.582) 117.857,-50.582 ccw(c115.926,-50.582) 117.291,-49.216 ; 116.942,-48.034 118.657,-49.749 ; C8.2@116.967,-40.491 C8.2@116.942,-40.516 C11.2@116.942,-46.866 ; C11.2@116.986,-46.866 ccw(c118.134,-46.866) 117.322,-47.678 ; v1@117.324,-54.444 ccw(c115.731,-52.852) 117.983,-52.852 ; v1@117.324,-54.374 cw(c115.731,-55.966) 117.983,-55.966 ; 117.547,-47.903 cw(c114.868,-50.582) EC3.2@118.657,-50.582 ; 117.983,-51.968 cw(c119.593,-51.968) EC3.2@118.454,-50.829 ; EC3.2@117.983,-49.908 117.983,-55.806 116.84,-56.949 116.459,-56.949 ; 118.068,-49.16 cw(c116.646,-50.582) EC3.2@118.657,-50.582 ; EC3.2@118.412,-50.332 ccw(c117.841,-49.749) 118.657,-49.749 ; 118.491,-51.828 cw(c119.903,-51.828) EC3.2@118.904,-50.829 ; EC3.2@118.86,-50.829 cw(c118.277,-51.412) 119.101,-51.412 ; EC3.2@118.86,-50.335 ccw(c118.277,-49.752) 119.101,-49.752 ; EC3.2@118.902,-50.332 cw(c119.473,-49.749) 118.657,-49.749 ; 118.913,-49.268 cw(c117.599,-50.582) EC3.2@119.457,-50.582 ; 119.101,-51.442 cw(c119.967,-51.442) EC3.2@119.354,-50.829 ; 119.101,-49.722 ccw(c119.967,-49.722) EC3.2@119.354,-50.335 ; C10.1@120.854,-37.162 R29.1@122.39,-37.162 ; EC1.2@14.084,-100.844 EC2.2@14.084,-89.414 14.084,-83.378 15.621,-81.841 ; EC1.2@14.084,-100.844 v1(18.263,-100.844) C5.1@18.263,-110.874 ; EC1.2@14.084,-100.844 15.193,-100.844 15.748,-101.399 16.891,-101.399 ; EC1.2@14.084,-100.844 15.274,-102.034 16.51,-102.034 17.145,-102.669 17.145,-109.756 17.653,-110.264 ; 15.113,-81.333 15.621,-81.841 ; 16.891,-101.399 17.653,-102.161 17.653,-110.264 ; 17.653,-126.291 19.304,-127.942 21.082,-127.942 18.263,-125.123 C5.1@18.263,-110.874 ; 17.653,-126.291 17.653,-124.513 ; 17.653,-124.513 17.653,-111.484 C5.1@18.263,-110.874 ; 17.653,-110.264 C5.1@18.263,-110.874 ; 18.415,-22.278 22.961,-22.278 33.147,-22.278 ; 21.59,-120.703 23.241,-122.354 ; 21.59,-120.703 21.59,-121.846 22.098,-122.354 23.241,-122.354 ; 23.241,-122.354 46.355,-122.354 47.371,-123.37 47.371,-127.561 48.006,-128.196 64.135,-128.196 65.144,-127.187 ; 28.829,-70.792 28.829,-72.316 v1@29.337,-72.316 ; v1@29.337,-72.316 35.941,-72.316 37.592,-70.665 EC4.2@37.592,-67.496 ; C14.1@33.045,-55.96 33.045,-60.713 EC7.2@33.599,-61.267 ; C14.1@33.045,-55.96 33.045,-46.51 ; C14.1@33.045,-55.96 33.045,-55.654 33.528,-55.171 ; 33.045,-46.51 34.036,-45.519 ; EC7.2@33.599,-61.267 EC8.2@33.599,-67.998 33.599,-67.673 34.29,-66.982 ; 34.036,-45.519 36.449,-45.519 37.719,-44.249 ; EC5.2@37.14,-61.344 37.013,-61.471 EC4.2@37.013,-68.075 EC4.2@37.592,-67.496 ; EC5.2@37.14,-61.344 37.567,-60.917 C20.1@37.567,-56.01 ; EC5.2@37.14,-61.344 37.14,-56.437 C20.1@37.567,-56.01 ; C20.1@37.567,-56.01 37.567,-47.322 38.481,-46.408 ; C20.1@37.567,-56.01 37.567,-55.654 36.957,-55.044 36.957,-47.043 37.592,-46.408 38.481,-46.408 ; 38.481,-46.408 C21.1@40.005,-46.408 40.767,-46.408 ; 45.085,-88.445 45.085,-83.111 ; 45.085,-83.111 45.085,-82.73 46.99,-80.825 v1(46.99,-80.444) v1@46.355,-80.444 ; 45.085,-83.111 v1@45.085,-81.714 ; v1@45.085,-81.714 v1@46.355,-80.444 ; 73.025,-52.885 74.295,-52.885 ; 74.295,-52.885 v1(76.2,-52.885) ; v1(76.2,-52.885) 76.225,-52.885 D12.2@76.225,-50.472 v1@76.225,-51.971 ; 76.225,-51.679 cw(c77.432,-51.679) 76.579,-50.826 ccw(c77.432,-51.679) 76.225,-51.679 ; 76.225,-51.679 ccw(c75.018,-51.679) 75.871,-50.826 cw(c75.018,-51.679) 76.225,-51.679 ; v1@109.093,-56.949 v1(108.585,-57.457) 117.856,-57.457 119.101,-56.212 119.101,-49.456 116.942,-47.297 C11.2@116.942,-46.866 ; v1@109.093,-56.949 116.459,-56.949 ; 116.459,-56.949 117.475,-56.949 118.491,-55.933 118.491,-50.748 EC3.2@118.657,-50.582 ; C11.2@116.942,-46.866 116.942,-48.867 EC3.2@118.657,-50.582 ; EC3.2@118.657,-50.582 118.657,-49.749 ; 45.085,-83.246 cw(c46.508,-83.246) 45.56,-82.185 ccw(c46.508,-83.246) 45.085,-83.246
  Top Layer w1.5: EC6.2@13.537,-77.602 ccw(c14.206,-77.792) EC6.2@13.714,-78.283 ; EC1.2@14.084,-100.844 EC6.2@14.084,-77.984 14.084,-78.653 16.256,-80.825 18.669,-80.825 18.796,-80.952 v1(18.796,-81.841) 15.875,-81.841 14.338,-83.378 14.084,-83.378 ; 14.084,-81.656 cw(c16.198,-81.656) 14.703,-80.161 ; 14.084,-81.074 cw(c16.632,-81.074) 14.83,-79.272 ; 14.084,-79.232 ccw(c16.198,-79.232) 14.703,-80.727 ; EC6.2@14.084,-78.036 ccw(c16.632,-78.036) 14.83,-79.838 ; EC6.2@14.98,-78.011 ccw(c17.022,-78.59) 15.521,-80.09 ; 15.846,-81.558 cw(c17.616,-83.328) v1@17.616,-80.825 ; v1@16.547,-80.825 cw(c16.547,-83.328) 18.317,-81.558 ; 17.309,-80.825 cw(c17.309,-83.328) 19.079,-81.558 ; 17.985,-80.228 cw(c17.132,-81.656) v1@18.796,-81.656 ; 18.063,-80.288 cw(c16.293,-82.058) v1@18.796,-82.058 ; 18.317,-82.124 ccw(c17.16,-80.967) v1@18.796,-80.967 ; 28.927,-71.906 cw(c30.697,-73.676) v1@30.697,-71.173 ; v1(29.337,-71.173) 31.877,-71.173 ; 29.934,-71.173 cw(c29.934,-73.243) 31.398,-71.779 ; 29.943,-71.906 cw(c31.713,-73.676) v1@31.713,-71.173 ; EC8.2@33.599,-67.998 33.599,-70.34 32.766,-71.173 31.877,-71.173 ; EC4.2@37.013,-68.075 37.013,-69.974 35.814,-71.173 31.877,-71.173 ; J4.9@63.843,-78.8 cw(c66.373,-80.668) 66.373,-77.523 ; J4.10@63.843,-76.246 ccw(c66.373,-74.378) 66.373,-77.523 ; J4.11@66.363,-78.8 ccw(c63.833,-80.668) 63.833,-77.523 ; J4.12@66.363,-76.246 cw(c63.833,-74.378) 63.833,-77.523 ; 63.833,-77.523 66.373,-77.523 ; 63.833,-77.523 63.833,-76.301 63.881,-76.253 J4.12@66.373,-76.253 J4.11@66.373,-78.793 J4.9@63.833,-78.793 63.833,-77.523
  Bottom Layer w0.3: v1@22.338,-22.137 ccw(c21.996,-21.795) 22.479,-21.795 ccw(c22.962,-21.795) v1@22.62,-22.137 ; v1(22.479,-22.278) 22.479,-16.248 22.799,-15.928 ; v1@22.553,-13.153 cw(c21.958,-13.748) 22.799,-13.748 ; v1@22.799,-12.941 22.799,-15.928 ; 25.447,-15.928 ccw(c25.447,-14.578) v1@26.402,-15.533 ; 26.171,-15.928 ccw(c26.171,-15.302) v1@26.614,-15.745 ; 26.289,-15.928 22.799,-15.928 ; v1@26.402,-15.815 cw(c26.06,-16.157) 26.543,-16.157 cw(c27.026,-16.157) v1@26.684,-15.815 ; v1(26.543,-15.674) 26.543,-16.944 26.924,-17.325 36.957,-17.325 37.592,-17.96 ; 41.021,-80.746 41.148,-80.619 ; J2.5@74.511,-124.375 ccw(c73.653,-123.156) 75.144,-123.156 ccw(c76.635,-123.156) J2.5@75.777,-124.375 ; J2.5@74.684,-124.621 ccw(c74.06,-123.734) 75.144,-123.734 ccw(c76.228,-123.734) J2.5@75.604,-124.621 ; J2.5@75.144,-125.275 75.144,-123.156 75.565,-122.735 94.742,-122.735 95.144,-123.137 ; 81.761,-122.735 cw(c81.761,-123.651) v1@82.409,-123.003 ; v1@82.691,-123.003 cw(c83.339,-123.651) 83.339,-122.735 ; J2.3@84.404,-124.461 ccw(c82.885,-122.789) 85.144,-122.789 ; J2.3@84.606,-124.683 ccw(c83.501,-123.467) 85.144,-123.467 ccw(c86.787,-123.467) J2.3@85.682,-124.683 ; J2.3@85.144,-125.275 85.144,-122.789 ; J2.3@85.884,-124.461 cw(c87.403,-122.789) 85.144,-122.789 ; 87.543,-122.735 cw(c87.543,-123.651) v1@88.191,-123.003 ; v1@88.474,-123.003 cw(c89.122,-123.651) 89.122,-122.735 ; J2.1@94.505,-124.38 ccw(c93.616,-123.137) 95.144,-123.137 ; J2.1@94.679,-124.624 ccw(c94.033,-123.72) 95.144,-123.72 ccw(c96.255,-123.72) J2.1@95.609,-124.624 ; J2.1@95.144,-125.275 95.144,-123.137 ; J2.1@95.783,-124.38 cw(c96.672,-123.137) 95.144,-123.137 ; J8.5@115.277,-115.33 ccw(c114.252,-114.305) 115.701,-114.305 ccw(c117.15,-114.305) J8.5@116.125,-115.33 ; J8.5@115.701,-115.754 115.701,-106.475
  Bottom Layer w0.45: v1(47.625,-89.461) v1(52.578,-89.461) ; v1(57.658,-89.461) v1(75.692,-89.461) v1(80.518,-89.461)
  Bottom Layer w0.65: v1(89.154,-89.461) 104.648,-89.461 ; v1(102.997,-33.327) v1(117.41,-33.327) ; 105.991,-90.804 104.648,-89.461 ; 106.97,-106.352 cw(c106.97,-107.713) v1@107.932,-106.751 ; v1@107.968,-106.751 cw(c108.93,-107.713) 108.93,-106.352 ; 108.18,-106.352 cw(c108.18,-107.713) v1@109.142,-106.751 ; v1@109.178,-106.751 cw(c110.14,-107.713) 110.14,-106.352 ; v1(113.665,-8.435) 113.792,-8.562 v1(120.653,-8.562) ; v1@113.683,-8.417 ccw(c114.032,-8.068) 114.032,-8.562 ; v1@114.176,-7.924 ccw(c115.716,-6.384) 115.716,-8.562 ; v1(116.967,-39.169) J7.1@116.967,-35.74 ; v1(117.856,-106.352) v1(114.173,-106.352) 106.553,-106.352 105.991,-105.79 105.991,-90.042 105.41,-89.461 104.648,-89.461 ; v1@123.465,-28.19 ccw(c122.344,-27.069) 123.93,-27.069 ; v1@123.485,-28.183 ccw(c123.561,-27.094) 124.333,-27.866 ; v1@123.912,-24.582 cw(c122.897,-25.597) 124.333,-25.597 ; 123.93,-25.089 cw(c125.366,-25.089) v1@124.351,-24.074 ; v1@123.93,-24.704 cw(c124.61,-24.704) v1@124.343,-24.079 ; 124.333,-27.866 v1(124.333,-24.056) ; 124.333,-27.866 123.991,-28.208 v1(123.483,-28.208) 123.93,-27.761 v1(123.93,-24.564) 124.333,-24.161 v1(124.333,-24.056) ; v1(124.333,-24.056) cw(c123.843,-24.056) 123.926,-24.539 ccw(c123.843,-24.056) v1(124.333,-24.056)
  Bottom Layer w0.8: v1(17.526,-100.844) 20.908,-100.844 21.59,-101.526 v1(21.59,-105.844) v1(21.59,-106.606) ; v1@26.493,-15.674 ccw(c26.986,-15.674) 26.637,-16.022 ; 27.686,-17.071 27.241,-16.626 ; 30.282,-16.626 ccw(c30.282,-15.663) v1@30.964,-16.344 ; v1@30.893,-16.344 ccw(c31.574,-15.663) 31.574,-16.626 ; v1@36.907,-53.776 ccw(c37.567,-53.749) v1(37.567,-54.409) ; v1@36.922,-54.374 cw(c38.369,-55.821) 38.369,-53.774 ; v1@36.922,-53.809 ccw(c38.369,-52.362) 38.369,-54.409 ; v1@36.957,-54.654 cw(c37.979,-54.654) v1@37.545,-53.729 ; v1@36.957,-54.384 cw(c37.619,-54.384) v1@37.562,-53.724 ; v1@36.961,-53.724 cw(c36.905,-54.384) v1@37.567,-54.384 ; v1@36.963,-54.459 ccw(c36.877,-53.774) v1(37.567,-53.774) v1(37.567,-54.409) ; v1@36.978,-53.729 cw(c36.545,-54.654) v1@37.567,-54.654 ; v1@37.531,-54.374 cw(c38.979,-55.821) 38.979,-53.774 ; v1@37.531,-53.809 ccw(c38.979,-52.362) 38.979,-54.409 ; v1@37.56,-54.459 cw(c37.647,-53.774) v1(36.957,-53.774) ; v1@37.617,-54.407 ccw(c36.957,-54.434) v1(36.957,-53.774) ; v1(40.767,-36.121) 40.767,-33.073 37.973,-30.279 37.973,-18.341 ; 49.433,-55.552 cw(c49.433,-56.732) v1@50.268,-55.898 ; v1@50.197,-55.898 cw(c51.031,-56.732) 51.031,-55.552 ; v1(51.943,-46.281) 51.943,-49.075 52.578,-49.71 v1(53.848,-49.71) ; 57.277,-55.552 59.182,-57.457 71.12,-57.457 ; 58.039,-55.552 58.039,-55.679 59.182,-56.822 ; 59.182,-57.041 cw(c60.727,-57.041) v1@59.856,-55.765 ; 59.182,-55.552 59.182,-56.822 ; 59.392,-55.552 cw(c59.392,-56.299) v1@59.92,-55.771 ; 59.748,-56.256 ccw(c59.297,-55.806) v1@59.934,-55.806 ; v1@59.849,-55.771 cw(c60.377,-56.299) 60.377,-55.552 ; v1@59.865,-55.76 cw(c60.211,-56.615) 60.863,-55.963 ; v1@59.884,-55.856 ccw(c59.884,-55.219) 60.335,-55.669 ; v1@59.884,-55.756 cw(c59.884,-57.619) 61.202,-56.302 ; v1@59.911,-55.764 cw(c59.271,-56.756) 60.452,-56.756 ; v1@59.92,-55.841 ccw(c58.634,-54.556) 60.452,-54.556 ; 60.452,-56.568 60.452,-55.552 ; 60.452,-54.282 59.69,-55.044 47.752,-55.044 46.482,-53.774 45.72,-53.774 ; v1(60.452,-52.123) 60.452,-55.552 ; 61.722,-56.822 60.452,-55.552 ; 69.85,-56.822 J9.2@71.628,-55.044 ; 71.184,-56.377 ccw(c70.514,-55.708) J9.2@71.327,-55.223 ; J9.2@71.278,-55.044 cw(c70.433,-55.044) 71.031,-55.641 cw(c71.628,-56.239) J9.2@71.628,-55.394 ; v1@74.788,-52.885 ccw(c74.788,-50.838) v1@76.235,-52.285 ; v1@75.265,-52.27 ccw(c76.2,-51.867) v1(76.2,-52.885) v1(74.676,-52.885) ; v1(75.311,-52.25) v1(74.676,-52.885) ; v1@75.361,-52.254 cw(c74.676,-52.198) v1(74.676,-52.885) ; 77.373,-57.457 ccw(c77.373,-56.277) v1@78.208,-57.111 ; v1@78.137,-57.111 ccw(c78.971,-56.277) 78.971,-57.457 ; 79.285,-57.457 ccw(c79.285,-55.843) v1@80.426,-56.984 ; v1@80.356,-56.984 ccw(c81.497,-55.843) 81.497,-57.457 ; 83.998,-57.457 ccw(c83.998,-56.58) v1@84.617,-57.2 ; 84.181,-56.949 cw(c84.181,-57.565) v1@84.617,-57.13 ; v1@84.547,-57.2 ccw(c85.166,-56.58) 85.166,-57.457 ; v1@84.547,-57.13 cw(c84.983,-57.565) 84.983,-56.949 ; 89.766,-57.457 ccw(c89.766,-55.843) v1@90.908,-56.984 ; v1@90.837,-56.984 ccw(c91.978,-55.843) 91.978,-57.457 ; 95.153,-56.949 cw(c95.153,-58.129) v1@95.988,-57.295 ; v1@95.917,-57.295 cw(c96.751,-58.129) 96.751,-56.949 ; 99.217,-56.949 cw(c99.217,-58.129) v1@100.052,-57.295 ; v1@99.981,-57.295 cw(c100.815,-58.129) 100.815,-56.949 ; 102.667,-57.457 ccw(c102.667,-56.58) v1@103.286,-57.2 ; 102.85,-56.949 cw(c102.85,-57.565) v1@103.286,-57.13 ; v1@103.216,-57.2 ccw(c103.835,-56.58) 103.835,-57.457 ; v1@103.216,-57.13 cw(c103.652,-57.565) 103.652,-56.949 ; 107.479,-56.949 cw(c107.479,-58.563) v1@108.62,-57.422 ; 107.86,-57.457 ccw(c107.86,-55.843) v1@109.001,-56.984 ; 108.241,-56.949 cw(c108.241,-58.563) v1@109.382,-57.422 ; v1@108.55,-57.422 cw(c109.691,-58.563) v1@109.691,-56.949 ; v1@108.749,-57.457 ccw(c108.749,-55.843) v1@109.89,-56.984 ; v1@108.934,-56.987 ccw(c109.374,-56.468) v1(109.855,-56.949) ; v1@109.297,-57.452 cw(c109.855,-57.51) v1(109.855,-56.949) ; v1@109.905,-56.954 cw(c109.347,-56.896) v1(109.347,-57.457) ; 27.241,-16.626 26.543,-15.928 v1(26.543,-15.674) 26.543,-16.69 26.924,-17.071 36.703,-17.071 37.973,-18.341 ; 27.241,-16.626 37.02,-16.626 37.973,-17.579 37.973,-18.341 ; v1(36.957,-54.409) ccw(c36.957,-53.749) 37.617,-53.776 cw(c36.957,-53.749) v1(36.957,-54.409) ; v1(36.957,-54.409) v1(36.957,-53.774) ; v1(36.957,-54.409) v1(37.567,-54.409) ; v1(36.957,-54.409) 46.355,-54.409 47.498,-55.552 ; v1(36.957,-53.774) 45.72,-53.774 ; 45.72,-53.774 47.498,-55.552 ; 47.498,-55.552 60.452,-55.552 ; 59.182,-56.822 60.452,-55.552 ; 59.182,-56.822 70.739,-56.822 71.628,-55.933 J9.2@71.628,-55.044 ; 71.12,-57.457 71.628,-56.949 71.628,-56.441 ; 71.12,-57.457 v1(109.347,-57.457) ; 71.628,-56.441 J9.2@71.628,-55.044 ; 71.628,-56.441 72.136,-56.949 v1(109.855,-56.949) ; 71.628,-55.889 cw(c72.473,-55.889) 71.875,-55.291 ccw(c72.473,-55.889) 71.628,-55.889 ; 71.628,-55.889 ccw(c70.783,-55.889) 71.381,-55.291 cw(c70.783,-55.889) 71.628,-55.889 ; v1(109.347,-57.457) v1(109.855,-56.949)
  Bottom Layer w1: 41.148,-80.619 J1.1@41.148,-77.015
  Bottom Layer w1.5: v1@14.097,-79.809 ccw(c14.762,-79.144) 15.373,-79.859 ; 14.703,-80.727 ccw(c14.749,-80.681) 14.749,-80.746 ; 14.703,-80.161 cw(c15.247,-80.705) 15.247,-79.936 ; 14.725,-79.936 cw(c14.725,-80.705) 15.269,-80.161 ; 14.83,-79.838 ccw(c15.067,-79.601) 15.067,-79.936 ; 15.159,-79.936 ccw(c15.159,-79.601) 15.396,-79.838 ; 15.846,-81.558 cw(c17.807,-83.519) v1@17.807,-80.746 ; 16.07,-79.936 cw(c16.07,-81.138) 16.92,-80.288 ; v1@16.356,-80.746 cw(c16.356,-83.519) 18.317,-81.558 ; 16.556,-79.936 ccw(c16.556,-79.601) 16.793,-79.838 ; 16.637,-80.171 cw(c16.637,-80.432) 16.821,-80.247 ; 16.961,-80.387 cw(c16.776,-80.571) 17.037,-80.571 ; 17.118,-80.746 cw(c17.118,-83.519) 19.079,-81.558 ; 17.751,-81.558 cw(c19.712,-83.519) 19.712,-80.746 ; 18.513,-81.558 cw(c20.474,-83.519) 20.474,-80.746 ; 27.178,-81.841 27.178,-73.332 28.384,-72.125 ; 27.723,-71.173 cw(c27.723,-73.676) 29.493,-71.906 ; 28.105,-80.6 ccw(c28.458,-80.247) 28.458,-80.746 ; 28.318,-80.746 ccw(c28.318,-80.247) 28.671,-80.6 ; 28.927,-71.906 cw(c30.697,-73.676) v1@30.697,-71.173 ; v1@29.019,-72.125 ccw(c29.019,-69.839) 30.636,-71.456 ; 29.034,-71.434 ccw(c30.543,-70.132) v1@30.543,-72.125 ; 29.684,-71.372 cw(c28.385,-70.628) 28.385,-72.125 ; 29.912,-71.941 cw(c31.496,-73.19) v1(31.496,-71.173) ; 29.934,-71.173 cw(c29.934,-73.243) 31.398,-71.779 ; 30.715,-72.062 cw(c30.976,-72.062) 30.791,-71.878 ; 30.931,-71.738 cw(c31.115,-71.923) 31.115,-71.662 ; 44.454,-80.746 cw(c44.454,-82.218) 45.495,-81.177 ; 44.929,-81.743 ccw(c45.166,-81.506) 45.166,-81.841 ; 44.929,-81.177 cw(c45.97,-82.218) v1@45.97,-80.746 ; 45.258,-81.841 ccw(c45.258,-81.506) 45.495,-81.743 ; 45.31,-81.939 cw(c45.547,-82.176) 45.547,-81.841 ; 45.47,-80.746 cw(c45.47,-82.218) 46.511,-81.177 ; 45.639,-81.841 cw(c45.639,-82.176) 45.876,-81.939 ; 45.818,-80.727 ccw(c45.864,-80.681) 45.864,-80.746 ; 45.945,-81.743 ccw(c46.182,-81.506) 46.182,-81.841 ; 45.945,-81.177 cw(c46.986,-82.218) v1@46.986,-80.746 ; 46.274,-81.841 ccw(c46.274,-81.506) 46.511,-81.743 ; 46.338,-80.746 ccw(c46.338,-80.681) 46.384,-80.727 ; 46.707,-80.727 ccw(c46.753,-80.681) 46.753,-80.746 ; 47.227,-80.746 ccw(c47.227,-80.681) 47.273,-80.727 ; 61.928,-81.841 63.833,-79.936 ; 62.738,-81.841 63.833,-80.746 ; 63.004,-80.765 ccw(c61.033,-78.793) J4.9@63.821,-78.793 ; J4.9@63.826,-78.802 cw(c61.656,-81.542) 65.151,-81.542 ; J4.10@63.825,-76.261 cw(c60.622,-79.464) 65.151,-79.464 ; J4.9@63.826,-78.783 ccw(c62.073,-76.253) 65.151,-76.253 ; 65.151,-81.498 cw(c68.72,-81.498) J4.11@66.381,-78.802 ; 65.151,-81.206 65.151,-76.253 ; 65.151,-79.232 cw(c69.352,-79.232) J4.12@66.381,-76.261 ; J4.11@66.373,-78.793 J4.9@63.833,-78.793 ; J4.11@66.38,-78.784 cw(c68.37,-76.253) 65.151,-76.253 ; v1@15.034,-80.746 63.833,-80.746 ; v1@15.034,-80.746 v1(14.224,-79.936) 16.51,-79.936 18.415,-81.841 ; v1@15.034,-80.746 v1(16.129,-81.841) 18.415,-81.841 ; 18.415,-81.841 25.908,-81.841 ; 25.908,-81.841 65.278,-81.841 66.373,-80.746 J4.12@66.373,-76.253 65.151,-76.253 ; 25.908,-81.841 25.908,-72.697 27.432,-71.173 v1(29.337,-71.173) ; 28.384,-72.125 v1(29.337,-71.173) ; 28.384,-72.125 v1@30.543,-72.125 ; v1(29.337,-71.173) v1(31.496,-71.173) ; v1@30.543,-72.125 v1(31.496,-71.173) ; 63.833,-80.746 63.833,-79.936 ; 63.833,-79.936 J4.9@63.833,-78.793 ; J4.9@63.833,-78.793 J4.10@63.833,-76.253 65.151,-76.253